# Altium PCB MCU_M_V2.PcbDoc
Units mm, origin at the board's own origin, x right, y up, seen from the top; angles counter-clockwise.
Board outline 26.88 x 19 mm, 2 copper layers (Top Layer, Bottom Layer); 30 components, 52 nets, 164 pads, 77 vias.
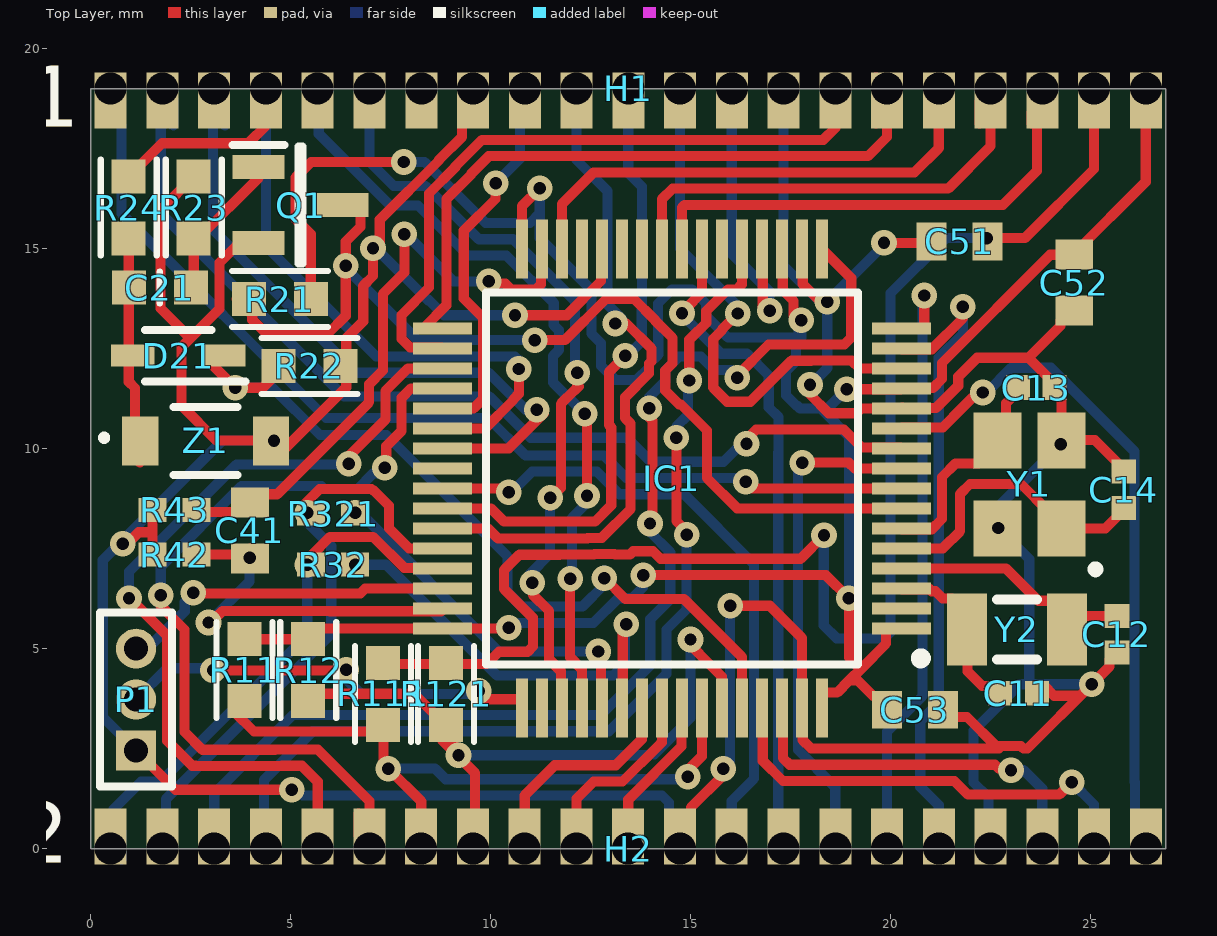
[diagram p0: Top Layer view]
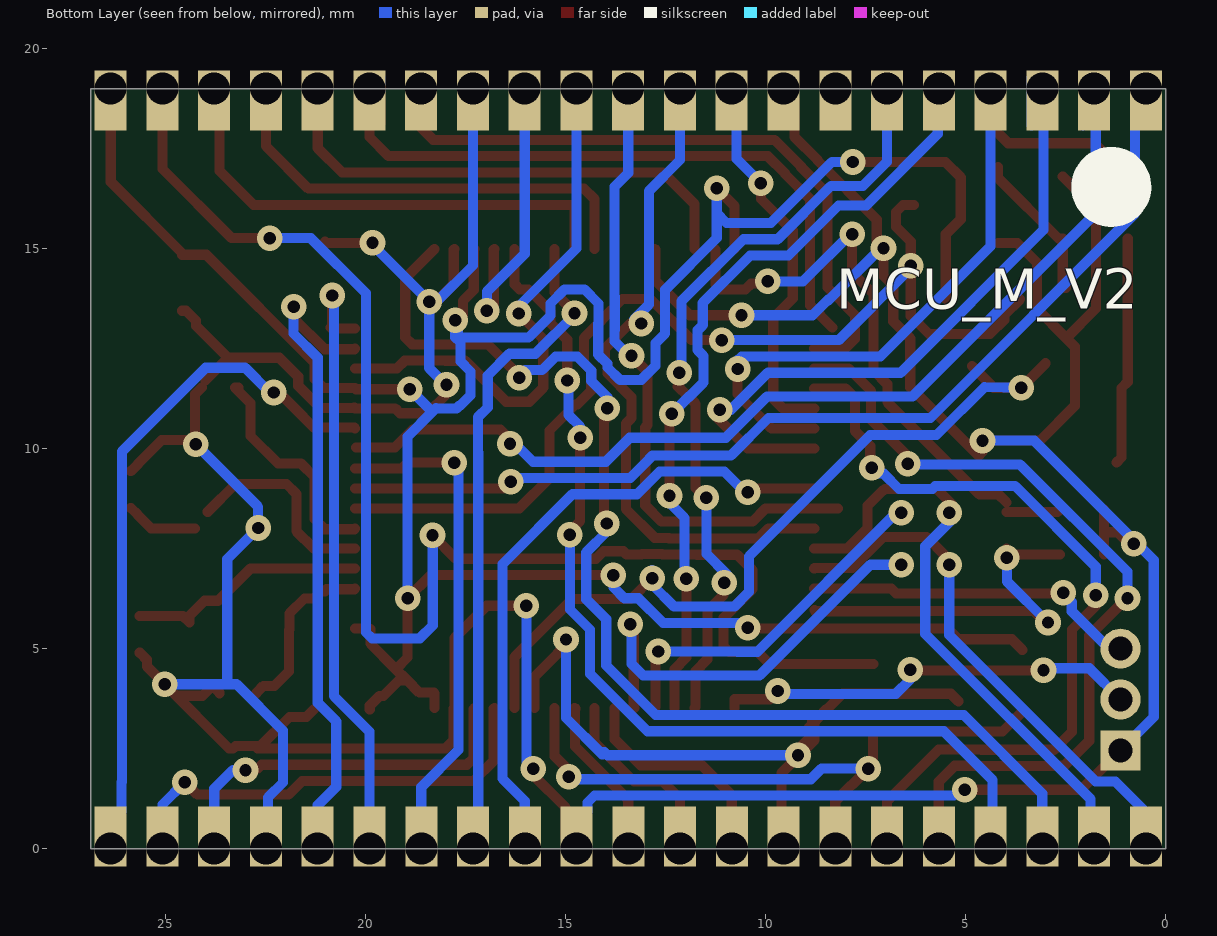
[diagram p1: Bottom Layer view, seen from below]
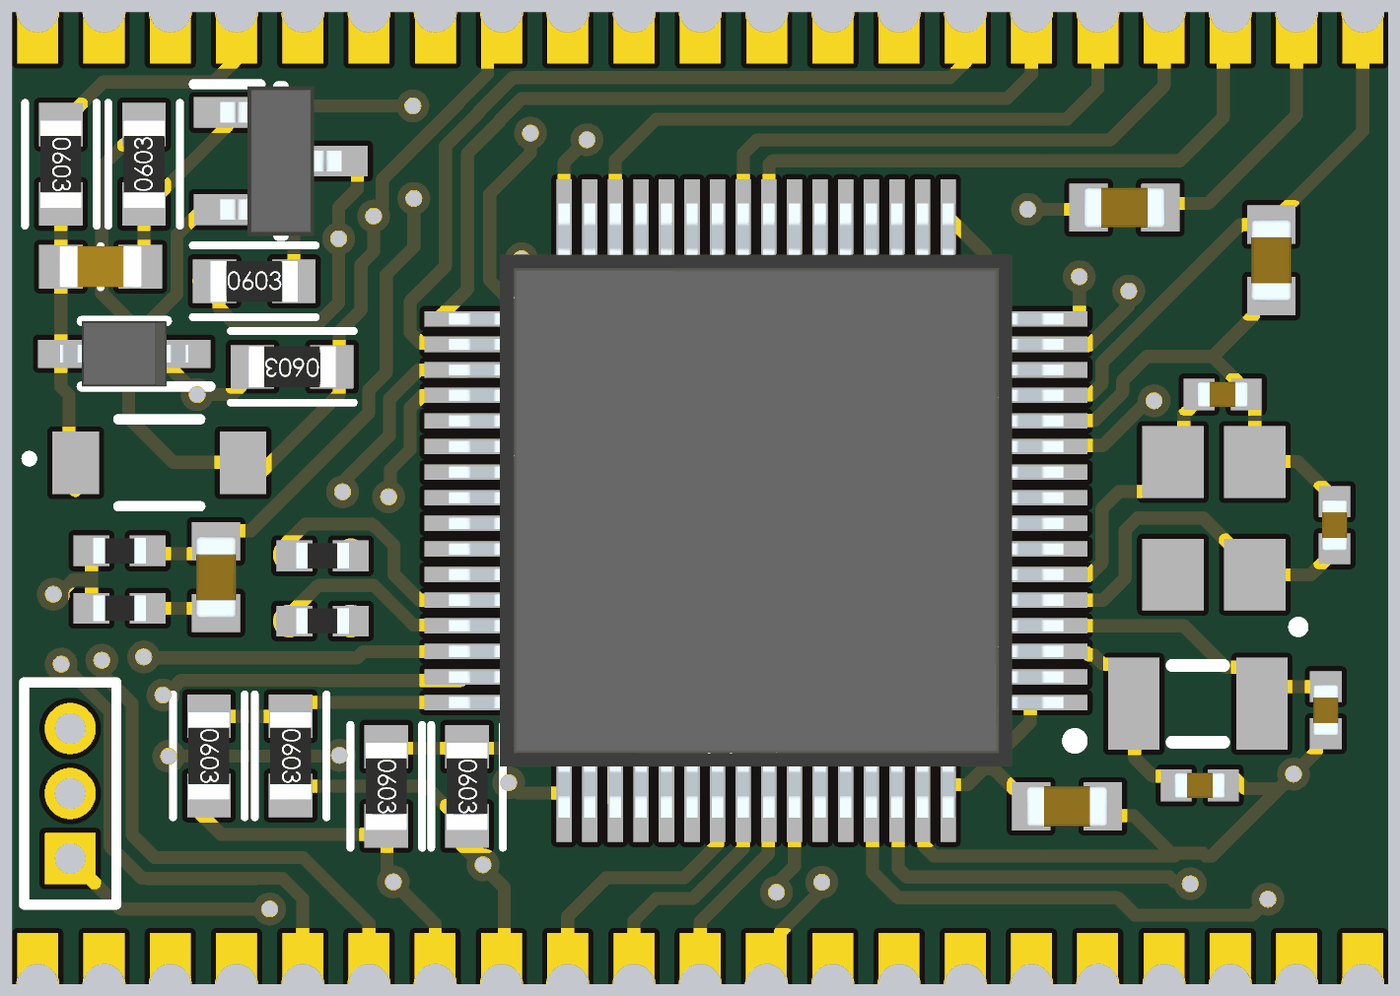
[diagram p2: 3D render of the assembled board from above, using the file's embedded part models]

## Layer stack, top to bottom
Top Solder: solder mask 0.0102, Solder Resist, Dk 3.5
Top Layer: signal copper 0.0356
Dielectric 1: dielectric 0.32, FR-4, Dk 4.8
Bottom Layer: signal copper 0.0356
Bottom Solder: solder mask 0.0102, Solder Resist, Dk 3.5

## Board outline
0,0 26.876,0 26.876,19 0,19

## Design rules (kind name [scope] priority, off if disabled: settings)
AssemblyTestPointUsage SilkToBoardRegionClearance_1 [All] p2:
AssemblyTestPointUsage SilkToBoardRegionClearance [All] p3:
Clearance [All] p1: gap=0.152 ignorepadtopadclearanceinfootprint=FALSE except(0: Arc-Hole Track-Hole SMDPad-Hole THPad-Hole Via-Hole Fill-Hole Poly-Hole Region-Hole Text-Hole)
FanoutControl Fanout_Default [All] p5: bgadir=In bgaviamode=Centered fanoutstyle=Auto fanoutdirection=Alternating viagrid=0.025 // Fanout_Default (Default Rule)
HoleSize [All] p1: absolutevalues=TRUE maxlimit=6.35 minlimit=0.3 maxpercent=80.000 minpercent=20.000
MatchedLengths DiffPair_DIFF100MatchedLengths [InDifferentialPairClass('DIFF100')] p1: tolerance=0.152 checknetsindiffpair=TRUE checkdiffpairvsdiffpair=FALSE checkxsignals=FALSE checkothers=FALSE usedelayunits=FALSE
MinimumSolderMaskSliver [All] p1: minsoldermaskwidth=0.05
MinimumSolderMaskSliver SilkscreenOverComponentPads_2 [All] p2: minsoldermaskwidth=0.254
MinimumSolderMaskSliver SilkToSolderMaskClearance_1 [IsPad] p3: minsoldermaskwidth=0.1
MinimumSolderMaskSliver SilkscreenOverComponentPads_1 [All] p4: minsoldermaskwidth=0.254
MinimumSolderMaskSliver SilkToSolderMaskClearance [IsPad] p5: minsoldermaskwidth=0.254
MinimumSolderMaskSliver SilkscreenOverComponentPads [All] p6: minsoldermaskwidth=0.254
PolygonConnect [All] p1: connectstyle=Direct reliefconductorwidth=0.254 reliefentries=4 polygonreliefangle="90 Angle" airgapwidth=0.254
RoomDefinition MCU_M_V2 [InComponentClass('MCU_M_V2')] p1: confinementstyle=ConfineIn formatcopy=TRUE lockcomponents=FALSE outline -0.076,-0.584 26.962,-0.584 26.962,19.558 -0.076,19.558
RoutingVias [All] p1: holewidth=0.305 width=0.635 viastyle="Through Hole" minholewidth=0.305 minwidth=0.635 maxholewidth=0.711 maxwidth=1.27
SMDNeckDown [All] p1: percent=90.000
SilkToBoardRegionClearance SilkToBoardRegionClearance_2 [All] p1:
SilkToSolderMaskClearance SilkToSolderMaskClearance_2 [IsPad] p1: minsilkscreentomaskgap=0.1 clearancetoexposedcopper=TRUE
SolderMaskExpansion [All] p1: expansion=0.102
Width [All] p1: maxlimit=2.54 minlimit=0.152 preferedwidth=0.254
25 further rules are at their usual default settings.

## Components (designator, comment, footprint, x,y, rotation, side; value= is the part's Value field where it differs from the comment)
C11 "GCQ1555C1H180FB01D" CAPC1005X55N 23.194,3.887 r180 top
C12 "GCQ1555C1H180FB01D" CAPC1005X55N 25.657,5.359 r90 top
C13 "GCQ1555C1H8R0BB01D" CAPC1005X55N 23.641,11.529 r180 top
C14 "GCQ1555C1H8R0BB01D" CAPC1005X55N 25.826,8.973 r270 top
C21 "0.10µF" SMD-0603C 1.727,14.025 r270 top
C41 "GRM188R71A225KE15D" CAPC1608X90N 3.982,7.957 r270 top
C51 "C0603C104K8RACTU" CAPC1608X90N 21.723,15.18 r0 top
C52 "C0603C104K8RACTU" CAPC1608X90N 24.59,14.15 r90 top
C53 "C0603C104K8RACTU" CAPC1608X90N 20.602,3.478 r180 top
D21 "BAT60JFILM" SOD2513X117N 2.189,12.324 r180 top
H1 "CASTELLATED 21 pin" "CASTELLATED 21 pin" 26.378,19 r180 top locked
H2 "CASTELLATED 21 pin" "CASTELLATED 21 pin" 0.5,0 r0 top
IC1 "STM32F107RCT6" QFP50P1200X1200X160-64N 14.529,9.258 r180 top
P1 "MHDR1X3" MHDR1X3 1.134,2.459 r90 top
Q1 "IRLML6246TRPBF" SOT95P237X112-3N 5.249,16.091 r0 top
R11 "10k" SMD-0603-RES 3.842,4.465 r180 top
R12 "10k" SMD-0603-RES 5.439,4.465 r180 top
R21 "10k" SMD-0603-RES 4.728,13.74 r270 top
R22 "10k" SMD-0603-RES 5.47,12.068 r90 top
R23 "100k" SMD-0603-RES 2.576,16.028 r0 top
R24 "1k" SMD-0603-RES 0.95,16.028 r180 top
R32 "RK73Z1ETTP" RESC1005X40N 6.062,7.1 r0 top
R42 "RK73Z1ETTP" RESC1005X40N 2.099,7.351 r180 top
R43 "RK73Z1ETTP" RESC1005X40N 2.099,8.473 r180 top
R111 "10k" SMD-0603-RES 7.306,3.87 r180 top
R121 "10k" SMD-0603-RES 8.883,3.87 r180 top
R321 "RK73Z1ETTP" RESC1005X40N 6.062,8.375 r0 top
Y1 "NX3225GA-25.000M-STD-CRG-1" NX3225SA_1 23.47,9.106 r90 top
Y2 "NX3215SA-32.768K-STD-MUA-8" NX3215SA 23.157,5.482 r0 top
Z1 "BZT52-C3V6J" SOD123 2.874,10.193 r0 top

## Footprints (in the part's own frame and the unit in brackets; to place one, negate y for a bottom-side part, rotate by r counter-clockwise, add the part's x,y. Pads: shape width x height; smd on the part's side, far side on the other; paste and mask are expansions set on the pad)
CAPC1005X55N [mm]
  rect 0.6x0.62 smd: 1(-0.46,0) 2(0.46,0)
  body extent -0.5,-0.25 0.5,0.25, height 0.55
CAPC1608X90N [mm]
  rect 0.75x0.94 smd: 1(-0.7,0) 2(0.7,0)
  body extent -0.8,-0.4 0.8,0.4, height 0.9
"CASTELLATED 21 pin" [mm]
  rect 0.8x1.4 / inner rect 0.8x1.5 / far side rect 0.8x1.5 hole 0.8 copper offset 0,0.3: 1(0,0) 2(1.294,0) 3(2.587,0) 4(3.881,0) 5(5.175,0) 6(6.469,0) 7(7.762,0) 8(9.056,0) 9(10.35,0) 10(11.644,0) 11(12.938,0) 12(14.232,0) 13(15.526,0) 14(16.82,0) 15(18.114,0) 16(19.408,0) 17(20.702,0) 18(21.996,0) 19(23.29,0) 20(24.584,0) 21(25.878,0)
MHDR1X3 [mm] "Connector; Header; 3 Position"
  rect 1x1 hole 0.6: 1(0,0)
  round 1 hole 0.6: 2(1.27,0) 3(2.54,0)
  silkscreen extent -0.9,-0.9 3.44,0.9
NX3215SA [mm]
  rect 1x1.8 smd: 1(-1.25,0) 2(1.25,0)
  silkscreen extent -0.5,-0.75 0.5,0.75
NX3225SA_1 [mm]
  rect 1.4x1.2 smd: 1(-1.1,-0.8) 2(1.1,-0.8) 3(1.1,0.8) 4(-1.1,0.8)
  silkscreen extent -2.19,-1.72 -2.05,-1.58
QFP50P1200X1200X160-64N [mm]
  rect 1.475x0.3 smd: 1(-5.738,3.75) 2(-5.738,3.25) 3(-5.738,2.75) 4(-5.738,2.25) 5(-5.738,1.75) 6(-5.738,1.25) 7(-5.738,0.75) 8(-5.738,0.25) 9(-5.738,-0.25) 10(-5.738,-0.75) 11(-5.738,-1.25) 12(-5.738,-1.75) 13(-5.738,-2.25) 14(-5.738,-2.75) 15(-5.738,-3.25) 16(-5.738,-3.75) 33(5.738,-3.75) 34(5.738,-3.25) 35(5.738,-2.75) 36(5.738,-2.25) 37(5.738,-1.75) 38(5.738,-1.25) 39(5.738,-0.75) 40(5.738,-0.25) 41(5.738,0.25) 42(5.738,0.75) 43(5.738,1.25) 44(5.738,1.75) 45(5.738,2.25) 46(5.738,2.75) 47(5.738,3.25) 48(5.738,3.75)
  rect 0.3x1.475 smd: 17(-3.75,-5.738) 18(-3.25,-5.738) 19(-2.75,-5.738) 20(-2.25,-5.738) 21(-1.75,-5.738) 22(-1.25,-5.738) 23(-0.75,-5.738) 24(-0.25,-5.738) 25(0.25,-5.738) 26(0.75,-5.738) 27(1.25,-5.738) 28(1.75,-5.738) 29(2.25,-5.738) 30(2.75,-5.738) 31(3.25,-5.738) 32(3.75,-5.738) 49(3.75,5.738) 50(3.25,5.738) 51(2.75,5.738) 52(2.25,5.738) 53(1.75,5.738) 54(1.25,5.738) 55(0.75,5.738) 56(0.25,5.738) 57(-0.25,5.738) 58(-0.75,5.738) 59(-1.25,5.738) 60(-1.75,5.738) 61(-2.25,5.738) 62(-2.75,5.738) 63(-3.25,5.738) 64(-3.75,5.738)
  silkscreen extent -6.35,-4.65 4.65,4.65, body extent -6,-6 6,6, height 1.6
RESC1005X40N [mm]
  rect 0.7x0.6 smd: 1(-0.55,0) 2(0.55,0)
  body extent -0.51,-0.25 0.51,0.25, height 0.4
SMD-0603-RES [mm]
  rect 0.85x0.85 smd: 1(0,0.775) 2(0,-0.775)
  silkscreen extent -0.7,-1.2 0.7,1.2, body extent -0.4,-0.85 0.4,0.85, height 0.56
SMD-0603C [mm]
  rect 0.85x0.85 smd: 1(0,0.775) 2(0,-0.775)
  silkscreen extent -0.4,0 0.4,0, body extent -0.4,-0.8 0.4,0.8, height 0.9
SOD123 [mm]
  rect 0.91x1.22 smd: 1(-1.635,0) 2(1.635,0)
  silkscreen extent -2.59,-0.85 0.8,0.85
SOD2513X117N [mm]
  rect 1.085x0.55 smd: 1(-1.14,0) 2(1.14,0)
  silkscreen extent -1.68,-0.64 0.83,0.64, body extent -1.25,-0.64 1.25,0.64, height 1.17
SOT95P237X112-3N [mm]
  rect 1.3x0.6 smd: 1(-1.05,0.95) 2(-1.05,-0.95) 3(1.05,0)
  silkscreen extent -1.7,-1.46 0.05,1.5, body extent -1.18,-1.46 1.18,1.46, height 1.12

## Part data
C11 C12: "Capacitor", Manufacturer_Name="Murata Electronics", Supplier Part Number 1=81-GCQ1555C1H180FB1D, Datasheet Link=https://search.murata.co.jp/Ceramy/image/img/A01X/G101/ENG/GCQ1555C1H180FB01-01.pdf, Height=0.55mm, Manufacturer_Part_Number=GCQ1555C1H180FB01D, Supplier 1=Mouser
C13 C14: "Capacitor", Manufacturer_Name="Murata Electronics", Supplier Part Number 1=81-GCQ1555C1H8R0BB1D, Datasheet Link=https://psearch.en.murata.com/capacitor/product/GCQ1555C1H8R0BB01%23.html, Height=0.55mm, Manufacturer_Part_Number=GCQ1555C1H8R0BB01D, Supplier 1=Mouser
C21: library part GCJ188R71H104KA12D, "CAP CER 0.1UF 50V X7R 0603", Digi-Key Part Number=490-5798-1-ND, Manufacturer="Murata Electronics North America", Operating Temperature="-55°C ~ 125°C", Package / Case="0603 (1608 Metric)", Ratings=AEC-Q200, Supplier Part Number 1=81-GCJ188R71H104KA2D, Temperature Coefficient=X7R, Tolerance=±10%, Voltage=50V, @ qty=0, Applications="Automotive, Boardflex Sensitive", Datasheets=http://www.murata.com/~/media/webrenewal/support/library/catalog/products/capacitor/mlcc/c03e.ashx, Factory Stock=0, Features="Soft Termination", Height - Seated (Max)=-, Image=//media.digikey.com/Renders/Murata%20Renders/0603%28LQG18%29.jpg, Lead Spacing=-, Lead Style=-, Minimum Quantity=1, Mounting Type="Surface Mount, MLCC", Packaging="Cut Tape (CT)", Part Number=GCJ188R71H104KA12D, Part Status=Active, Quantity Available=163695, Series=GCJ, Size / Dimension="0.063\" L x 0.031\" W (1.60mm x 0.80mm)", Supplier 1=Mouser, Thickness (Max)="0.035\" (0.90mm)", Unit Price (USD)=0.12
C41: "Capacitor", Manufacturer_Name="Murata Electronics", Supplier Part Number 1=81-GRM188R71A225KE15, Datasheet Link=https://psearch.en.murata.com/capacitor/product/GRM188R71A225KE15%23.html, Height=0.9mm, Manufacturer_Part_Number=GRM188R71A225KE15D, Supplier 1=Mouser
C51 C52 C53: "Capacitor", Manufacturer_Name=Kemet, Supplier Part Number 1=80-C0603C104K8R, Datasheet Link=https://search.kemet.com/component-edge/download/specsheet/C0603C104K8RACTU.pdf, Height=0.9mm, Manufacturer_Part_Number=C0603C104K8RACTU, Supplier 1=Mouser
D21: "Diode", Manufacturer_Name=STMicroelectronics, Mouser2 Part Number=511-BAT60JFILM, Datasheet Link=https://componentsearchengine.com/Datasheets/1/BAT60JFILM.pdf, Height=1.17mm, Manufacturer_Part_Number=BAT60JFILM, Mouser2 Price/Stock=https://www.mouser.com/Search/Refine.aspx?Keyword=511-BAT60JFILM, Supplier 1=Mouser, Supplier Part Number 1=511-BAT60JFILM
IC1: "Integrated Circuit", Manufacturer_Name=STMicroelectronics, Mouser2 Part Number=511-STM32F107RCT6, Datasheet Link=https://componentsearchengine.com/Datasheets/1/STM32F107RCT6.pdf, Height=1.6mm, Manufacturer_Part_Number=STM32F107RCT6, Mouser2 Price/Stock=https://www.mouser.com/Search/Refine.aspx?Keyword=511-STM32F107RCT6, Supplier 1=Mouser, Supplier Part Number 1=511-STM32F107RCT6
P1: "Header, 3-Pin", LatestRevisionDate=17-Jul-2002, LatestRevisionNote="Re-released for DXP Platform.", Publisher="Altium Limited"
Q1: "MOSFET (N-Channel)", Manufacturer_Name=Infineon, Supplier Part Number 1=942-IRLML6246TRPBF, Height=1.12mm, Manufacturer_Part_Number=IRLML6246TRPBF, Supplier 1=Mouser
R11 R12 R21 R22 R111 R121: library part ERJ-3EKF1002V, "RES SMD 10K OHM 1% 1/10W 0603", Digi-Key Part Number=P10.0KHCT-ND, Manufacturer="Panasonic Electronic Components", Operating Temperature="-55°C ~ 155°C", Package / Case="0603 (1608 Metric)", Power (Watts)="0.1W, 1/10W", Supplier Device Package=0603, Supplier Part Number 1=667-ERJ-3EKF1002V, Temperature Coefficient=±100ppm/°C, Tolerance=±1%, @ qty=1500, Composition="Thick Film", Datasheets=http://industrial.panasonic.com/www-cgi/jvcr13pz.cgi?E+PZ+3+AOA0002+ERJ3EKF1002V+7+WW, Factory Stock=0, Failure Rate=-, Features="Automotive AEC-Q200", Height - Seated (Max)="0.022\" (0.55mm)", Image=//media.digikey.com/Photos/Panasonic%20Photos/MFG_ERJ-P6W%20Series.jpg, Minimum Quantity=1, Number of Terminations=2, Packaging="Cut Tape (CT)", Part Number=ERJ-3EKF1002V, Part Status=Active, Quantity Available=6703141, Series=ERJ, Size / Dimension="0.063\" L x 0.031\" W (1.60mm x 0.80mm)", Supplier 1=Mouser, Unit Price (USD)=0.00379
R23: library part ERJ-3EKF1003V, "RES SMD 100K OHM 1% 1/10W 0603", Digi-Key Part Number=P100KHCT-ND, Manufacturer="Panasonic Electronic Components", Operating Temperature="-55°C ~ 155°C", Package / Case="0603 (1608 Metric)", Power (Watts)="0.1W, 1/10W", Supplier Device Package=0603, Supplier Part Number 1=667-ERJ-3EKF1003V, Temperature Coefficient=±100ppm/°C, Tolerance=±1%, @ qty=1500, Composition="Thick Film", Datasheets=http://industrial.panasonic.com/www-cgi/jvcr13pz.cgi?E+PZ+3+AOA0002+ERJ3EKF1003V+7+WW, Factory Stock=0, Failure Rate=-, Features="Automotive AEC-Q200", Height - Seated (Max)="0.022\" (0.55mm)", Image=//media.digikey.com/Photos/Panasonic%20Photos/MFG_ERJ-P6W%20Series.jpg, Minimum Quantity=1, Number of Terminations=2, Packaging="Cut Tape (CT)", Part Number=ERJ-3EKF1003V, Part Status=Active, Quantity Available=2179804, Series=ERJ, Size / Dimension="0.063\" L x 0.031\" W (1.60mm x 0.80mm)", Supplier 1=Mouser, Unit Price (USD)=0.00379
R24: library part ERJ-3EKF1001V, "RES SMD 1K OHM 1% 1/10W 0603", Digi-Key Part Number=P1.00KHCT-ND, Manufacturer="Panasonic Electronic Components", Operating Temperature="-55°C ~ 155°C", Package / Case="0603 (1608 Metric)", Power (Watts)="0.1W, 1/10W", Supplier Device Package=0603, Supplier Part Number 1=667-ERJ-3EKF1001V, Temperature Coefficient=±100ppm/°C, Tolerance=±1%, @ qty=1500, Composition="Thick Film", Datasheets=http://industrial.panasonic.com/www-cgi/jvcr13pz.cgi?E+PZ+3+AOA0002+ERJ3EKF1001V+7+WW, Factory Stock=0, Failure Rate=-, Features="Automotive AEC-Q200", Height - Seated (Max)="0.022\" (0.55mm)", Image=//media.digikey.com/Photos/Panasonic%20Photos/MFG_ERJ-P6W%20Series.jpg, Minimum Quantity=1, Number of Terminations=2, Packaging="Cut Tape (CT)", Part Number=ERJ-3EKF1001V, Part Status=Active, Quantity Available=5218845, Series=ERJ, Size / Dimension="0.063\" L x 0.031\" W (1.60mm x 0.80mm)", Supplier 1=Mouser, Unit Price (USD)=0.00379
R32 R42 R43 R321: "Resistor", Manufacturer_Name="KOA Speer", Supplier Part Number 1=660-RK73Z1ETTP, Height=0.4mm, Manufacturer_Part_Number=RK73Z1ETTP, Supplier 1=Mouser
Y1: "Crystal or Oscillator", Manufacturer_Name=NDK, Mouser2 Part Number=344-NX3225GA25MSTRG1, Datasheet Link=https://componentsearchengine.com/Datasheets/1/NX3225GA-25.000M-STD-CRG-1.pdf, Manufacturer_Part_Number=NX3225GA-25.000M-STD-CRG-1, Mouser2 Price/Stock=https://www.mouser.com/Search/Refine.aspx?Keyword=344-NX3225GA25MSTRG1, Supplier 1=Mouser, Supplier Part Number 1=344-NX3225GA25MSTRG1
Y2: "Crystal or Oscillator", Manufacturer_Name=NDK, Mouser2 Part Number=344-NX3215SA32768K8, Datasheet Link=https://componentsearchengine.com/Datasheets/1/NX3215SA-32.768K-STD-MUA-8.pdf, Manufacturer_Part_Number=NX3215SA-32.768K-STD-MUA-8, Mouser2 Price/Stock=https://www.mouser.com/Search/Refine.aspx?Keyword=344-NX3215SA32768K8, Supplier 1=Mouser, Supplier Part Number 1=344-NX3215SA32768K8
Z1: "Zener Diode", Manufacturer_Name=Nexperia, Mouser2 Part Number=771-BZT52-C3V6J, Datasheet Link=https://componentsearchengine.com/Datasheets/1/BZT52-C3V6J.pdf, Manufacturer_Part_Number=BZT52-C3V6J, Mouser2 Price/Stock=https://www.mouser.com/Search/Refine.aspx?Keyword=771-BZT52-C3V6J, Supplier 1=Mouser, Supplier Part Number 1=771-BZT52-C3V6J

## Via types
v1: diameter 0.64, hole 0.31, Top Layer to Bottom Layer, tented both sides, 77 vias

## Nets (pads, with @x,y where several pads share a name; then routed paths per layer and width w, separated by ;. In a path a pad name is that pad's centre, name@x,y a point inside that pad or via, vN(x,y) a via of type N, cw(c..) or ccw(c..) an arc to the next point about the centre after c; other vN are vias at no path point)
B1: H2.7 IC1.58 R11.1 R111.1 | length 16.7
  Top Layer w0.254: R11.1@3.589,3.421 4.081,2.929 7.322,2.929 7.322,2.123 v1(7.443,2.002) 8.263,1.182 H2.7 ; v1(14.927,1.798) 14.927,1.957 15.279,2.309 IC1.58
  Bottom Layer w0.254: v1(7.443,2.002) 8.611,2.002 8.877,1.736 14.865,1.736 v1(14.927,1.798)
B2: H2.8 IC1.59 R12.1 R121.1 | length 19.6
  Top Layer w0.254: R12.1@5.186,3.685 5.374,3.873 8.081,3.873 R121.1@8.482,3.472 ; R121.1@8.848,3.198 R121.1@8.848,3.106 ; v1(9.196,2.336) 9.196,2.487 R121.1@8.78,2.903 ; H2.8 9.611,0.055 9.611,1.889 8.78,2.72 R121.1@8.78,2.903 ; v1(14.996,5.23) 14.994,5.23 14.923,5.159 14.924,5.158 15.545,4.537 15.779,4.303 IC1.59 ; R121.1@8.482,3.472 R121.1@8.685,3.269 ; R121.1@8.482,3.472 8.482,3.496 R121.1@8.697,3.281 ; R121.1@8.685,3.269 R121.1@8.697,3.281 ; R121.1@8.685,3.269 R121.1@8.78,3.174 ; R121.1@8.697,3.281 8.78,3.198 R121.1@8.78,3.174 ; R121.1@8.78,2.903 R121.1@8.78,3.174 ; R121.1@8.78,2.903 R121.1@8.848,2.971 ; R121.1@8.78,3.174 R121.1@8.848,3.106 ; R121.1@8.848,2.971 R121.1@8.848,3.106 ; R121.1@8.848,2.971 8.915,3.039 R121.1@8.848,3.106
  Bottom Layer w0.254: v1(9.196,2.336) 13.962,2.336 14.038,2.411 14.089,2.36 14.996,3.267 v1(14.996,5.23)
B3: H2.9 IC1.55 | length 5.6
  Top Layer w0.254: H2.9 10.85,1.333 11.601,2.084 13.125,2.084 13.779,2.738 IC1.55
B4: H2.11 IC1.57 | length 4.1
  Top Layer w0.254: H2.11 13.438,1.224 14.767,2.553 IC1.57@14.767,3.509 ; IC1.57@14.756,3.497 IC1.57@14.767,3.509 ; IC1.57 IC1.57@14.767,3.509
B5: H2.10 IC1.56 | length 4.8
  Top Layer w0.254: H2.10 12.144,1.247 12.574,1.678 13.293,1.678 14.185,2.569 14.273,2.657 14.279,2.657 IC1.56
BOOT0: D21.1 IC1.60 R22.1 | length 20.5
  Top Layer w0.254: D21.1@3.004,12.134 v1(3.613,11.525) 4.304,11.525 R22.1@4.843,12.064 ; v1(12.844,6.765) 13.37,6.239 14.835,6.239 16.279,4.795 IC1.60 ; v1@12.844,6.79 12.932,6.79 v1@12.936,6.794
  Bottom Layer w0.254: v1(3.613,11.525) 4.531,11.544 5.735,10.34 7.388,10.34 10.42,7.309 10.42,6.422 10.79,6.052 12.29,6.052 12.844,6.605 v1(12.844,6.765) v1@12.844,6.963
GND: C11.1 C12.1 C13.1 C14.1 C51.1 C52.1 C53.1 H1.8 H1.14 H2.12 H2.18 IC1.12 IC1.18 IC1.28 IC1.63 P1.1 Q1.2 R22.2 R23.1 R42.2 R43.2 Y1.2 Y1.4 Z1.2 | length 123.9
  Top Layer w0.254: v1(0.804,7.624) 0.911,7.624 1.199,7.912 1.549,7.912 ; P1.1 2.121,1.472 v1(5.029,1.472) ; R42.2 1.549,7.912 ; R43.2 1.549,7.912 ; R23.1 1.749,15.976 1.749,13.503 2.487,12.765 ; Q1.2 3.712,15.141 3.219,14.648 3.219,13.497 2.487,12.765 ; H1.14 9.285,18.727 9.285,17.797 8.71,17.222 8.71,17.205 7.228,15.724 7.228,15.184 v1(7.059,15.015) 7.059,14.316 6.814,14.071 6.814,13.183 6.388,12.758 6.388,11.535 4.676,9.822 4.582,9.916 v1(4.582,10.201) 3.147,10.201 2.273,11.075 2.273,12.551 2.487,12.765 ; v1(10.608,13.337) 11.902,13.337 12.756,14.191 12.756,14.973 IC1.28 ; H2.12 15.005,0.273 15.005,1.029 15.812,1.836 v1(15.812,1.995) ; v1(15.985,6.073) 16.977,6.073 17.779,5.271 IC1.63 17.802,3.497 17.802,2.715 18.013,2.503 22.7,2.503 ; IC1.18 17.802,14.973 17.802,14.113 18.237,13.678 v1(18.415,13.678) ; v1(17.984,11.601) 17.984,11.354 18.451,10.886 19.146,10.886 19.268,11.008 IC1.12 IC1.12@20.278,11.02 ; v1(19.832,15.146) 20.989,15.146 C51.1 ; IC1.12@20.29,11.031 IC1.12@20.278,11.02 ; C53.1 21.486,3.294 21.909,3.294 22.64,2.563 23.256,2.563 23.316,2.503 23.419,2.503 v1(25.025,4.109) ; C11.1 23.654,3.897 23.827,4.07 23.837,4.07 24.084,3.823 24.739,3.823 v1(25.025,4.109) ; C13.1@24.012,11.704 23.444,12.272 ; C13.1@24.095,11.529 C13.1 24.27,11.36 Y1.2 ; Y1.2@24.28,10.216 25.102,10.216 25.696,9.622 25.696,9.612 25.869,9.439 C14.1@25.879,9.439 ; C52.1 24.495,13.45 24.247,13.202 24.247,13.075 23.444,12.272 ; C12.1 25.647,4.899 25.474,4.726 25.474,4.558 v1(25.025,4.109) ; IC1.12@20.278,11.02 21.136,11.02 21.69,11.574 21.69,11.797 22.165,12.272 23.444,12.272
  Bottom Layer w0.254: P1.1 0.301,3.292 0.301,7.215 3.287,10.201 v1(4.582,10.201) ; v1(5.029,1.472) 5.029,1.488 v1@5.084,1.543 ; v1@5.078,1.549 5.298,1.329 14.284,1.329 14.459,1.154 14.459,0.923 14.732,0.65 H2.12 ; v1(7.059,15.015) 7.125,15.015 8.431,13.709 8.447,13.725 8.835,13.337 v1(10.608,13.337) ; v1(15.812,1.995) 15.985,2.168 v1(15.985,6.073) ; H1.8 17.322,14.579 18.223,13.678 v1(18.415,13.678) ; v1(17.984,11.601) 18.002,11.601 18.415,12.014 v1(18.415,13.678) ; v1(19.832,15.146) 19.832,15.095 v1(18.415,13.678) ; H2.18 22.446,0.05 22.446,1.282 22.072,1.656 22.072,2.952 23.229,4.109 v1(25.025,4.109) 23.558,4.109 23.465,4.202 23.465,7.243 v1(22.692,8.016) 22.692,8.545 v1(24.255,10.108)
M1_D1: H2.2 IC1.44 R321.1 | length 15.2
  Top Layer w0.254: R321.1@5.465,8.347 5.514,8.396 R321.1@5.514,8.394 ; R321.1@5.514,8.468 5.5,8.482 5.357,8.625 5.726,8.994 7.019,8.994 7.059,8.954 7.078,8.954 7.456,8.576 7.456,8.012 7.96,7.508 IC1.44
  Bottom Layer w0.254: H2.2 1.794,0.35 1.88,0.436 1.88,1.235 6.013,5.368 6.013,7.56 5.413,8.16 v1(5.413,8.394)
M1_D2: H2.1 IC1.45 R32.1 | length 15.3
  Top Layer w0.254: R32.1@5.364,7.248 5.38,7.232 R32.1@5.438,7.174 ; v1(5.413,7.1) 5.364,7.1 R32.1@5.438,7.174 ; 6.363,7.796 5.983,7.796 5.512,7.325 R32.1 5.462,7.15 R32.1@5.438,7.174 ; 6.364,7.795 7.058,7.795 ; 7.078,7.781 7.839,7.02 8.779,7.02 IC1.45
  Bottom Layer w0.254: v1(5.413,7.1) 5.413,5.343 1.75,1.68 1.261,1.68 0.569,0.988 H2.1@0.569,0.65 ; H2.1@0.5,0.65 H2.1@0.569,0.65 ; H2.1@0.5,0.65 0.535,0.684 H2.1@0.569,0.65 ; H2.1@0.5,0.65 H2.1 0.773,-0.273 0.773,0.446 H2.1@0.569,0.65
M1_D3: H2.4 IC1.21 | length 24.9
  Top Layer w0.254: v1(14.643,10.274) 14.643,8.19 14.897,7.936 v1(14.897,7.849) ; v1(14.964,11.705) 14.964,12.722 15.026,12.784 15.031,12.784 15.391,13.144 15.391,13.44 15.93,13.979 16.15,13.979 16.279,14.108 IC1.21
  Bottom Layer w0.254: H2.4 4.329,0.052 4.329,1.711 5.553,2.935 12.957,2.935 14.397,4.375 14.397,5.48 14.897,5.98 v1(14.897,7.849) ; v1(14.643,10.274) 14.643,10.554 14.929,10.84 14.929,11.503 v1@15.131,11.705 ; v1(14.964,11.705) v1@15.131,11.705 ; v1@15.133,11.707 v1@15.131,11.705
M1_D4: H2.3 IC1.17 | length 29.7
  Top Layer w0.254: v1(13.96,11.012) 13.96,10.781 14.044,10.697 14.044,8.217 13.956,8.129 v1(13.982,8.129) ; v1(16.163,11.774) 16.163,11.823 16.947,12.607 17.838,12.607 17.839,12.608 18.843,12.608 19.014,12.779 19.014,14.261 IC1.17
  Bottom Layer w0.254: H2.3 3.088,1.378 5.052,3.342 12.755,3.342 13.991,4.578 13.991,5.736 14.491,6.236 14.491,7.407 13.97,7.928 13.982,7.94 v1(13.982,8.129) ; v1(13.96,11.012) 13.96,11.286 14.365,11.692 14.365,11.953 14.716,12.304 15.255,12.304 15.592,11.967 16.019,11.967 16.163,11.823 v1(16.163,11.774)
M1_D5: H1.20 IC1.10 | length 26.2
  Top Layer w0.254: v1(16.396,10.122) 16.396,10.242 16.631,10.477 18.831,10.477 19.277,10.031 IC1.10@20.244,10.031
  Bottom Layer w0.254: H1.20@1.862,18.282 H1.20@1.931,18.214 ; v1(16.396,10.122) 16.268,10.122 15.821,9.675 13.998,9.675 13.773,9.9 13.401,10.272 11.003,10.272 9.974,11.301 6.339,11.301 1.753,15.888 1.753,18.036 H1.20@1.931,18.214 ; H1.20@1.931,18.214 2.067,18.077 2.067,18.727 H1.20 1.794,18.35 H1.20@1.931,18.214
M1_D6: H1.21 IC1.8 | length 25.6
  Top Layer w0.254: v1(16.378,9.174) 16.544,9.008 IC1.8
  Bottom Layer w0.254: H1.21 0.5,18.35 0.773,18.077 0.773,15.877 5.883,10.767 9.933,10.767 10.868,9.832 12.826,9.832 13.031,9.627 13.389,9.268 16.284,9.268 v1(16.378,9.174)
M1_D7: H1.13 IC1.37 | length 9.7
  Top Layer w0.254: IC1.37 9.573,11.008 9.815,11.25 9.815,13.268 9.327,13.756 9.327,15.448 10.122,16.243 v1(10.122,16.637)
  Bottom Layer w0.254: v1(10.122,16.637) 10.731,17.247 10.731,18.879 H1.13
M2_D1: H2.17 IC1.15 | length 16.3
  Top Layer w0.254: IC1.15 20.29,12.485 21.026,12.485 21.806,13.265 v1(21.806,13.551)
  Bottom Layer w0.254: H2.17 21.202,1.085 20.739,1.548 20.739,3.183 21.202,3.646 21.202,12.274 21.806,12.878 v1(21.806,13.551)
M2_D2: H2.16 IC1.16 | length 15.7
  Top Layer w0.254: IC1.16 20.854,13.008 20.877,13.031 20.841,13.068 v1(20.841,13.83)
  Bottom Layer w0.254: H2.16 19.908,2.927 20.796,3.815 20.796,13.785 v1(20.841,13.83)
M2_D3: H2.15 IC1.9 | length 12.7
  Top Layer w0.254: v1(17.79,9.652) 18.952,9.652 19.096,9.508 IC1.9
  Bottom Layer w0.254: v1(17.79,9.652) 17.687,9.652 17.687,2.467 18.614,1.54 H2.15
M2_D4: H2.14 IC1.23 | length 16.9
  Top Layer w0.254: v1(14.782,13.383) 14.782,13.563 14.83,13.515 14.89,13.515 15.279,13.903 IC1.23
  Bottom Layer w0.254: v1(14.782,13.383) 14.726,13.383 14.705,13.362 14.772,13.362 15.761,12.373 16.412,12.373 16.954,11.831 16.954,11.03 17.198,10.785 17.198,9.909 17.19,9.901 17.19,0.13 H2.14
M2_D5: H2.13 IC1.41 | length 16.4
  Top Layer w0.254: IC1.41 10.352,9.008 v1(10.454,8.906) v1@10.532,8.906
  Bottom Layer w0.254: v1(10.454,8.906) 10.513,8.906 11.032,9.426 12.657,9.426 13.221,8.862 14.836,8.862 16.584,7.114 16.584,1.751 16.026,1.192 H2.13
M2_D6: H1.3 IC1.24 | length 13.1
  Top Layer w0.254: IC1.24 14.779,16.023 14.85,16.095 22.806,16.095 23.654,16.943 H1.3@23.654,18.264 ; H1.3 23.791,18.4 H1.3@23.654,18.264 ; H1.3@23.654,18.264 23.518,18.4 23.518,18.127 H1.3@23.654,18.264
M2_D7: H1.4 IC1.25 | length 12.8
  Top Layer w0.254: IC1.25 14.279,16.235 14.546,16.501 21.435,16.501 22.497,17.563 H1.4@22.497,18.4 ; H1.4 H1.4@22.497,18.4 ; H1.4@22.497,18.4 22.224,18.673 22.224,18.127 H1.4@22.497,18.4
M2_D8: H1.5 IC1.30 | length 12.6
  Top Layer w0.254: IC1.30 11.779,16.109 12.577,16.908 20.597,16.908 21.203,17.514 H1.5
M2_D9: H1.6 IC1.33 | length 18.2
  Top Layer w0.254: IC1.33@8.333,13.027 8.893,13.587 8.893,16.239 9.522,16.868 9.522,16.885 9.951,17.314 19.433,17.314 19.909,17.79 H1.6@19.909,18.4 ; H1.6@19.909,18.4 H1.6 19.636,19.273 19.636,18.127 H1.6@19.909,18.4
M2_D10: H1.7 IC1.34 | length 16.9
  Top Layer w0.254: IC1.34 8.768,12.531 7.985,12.531 7.773,12.744 7.773,13.342 8.459,14.028 8.459,16.38 9.116,17.037 9.116,17.054 9.783,17.721 18.318,17.721 18.616,18.019 H1.7
M3_D1: H1.16 IC1.51 | length 19.9
  Top Layer w0.254: v1(11.038,6.651) 11.054,6.635 11.054,6.347 11.461,5.941 11.461,4.733 11.754,4.44 11.754,3.545 IC1.51 ; v1(11.485,8.777) 11.485,8.63 11.461,8.606 11.483,8.584 11.507,8.584 11.615,8.692 11.519,8.788 11.755,9.024 11.755,11.12 12.106,11.471 12.118,11.471 12.201,11.554 12.16,11.595 v1(12.16,11.899)
  Bottom Layer w0.254: H1.16 6.97,17.175 7.577,16.569 8.374,16.569 9.705,15.237 10.559,15.237 12.111,13.686 12.111,12.762 ; v1(11.038,6.651) 11.038,6.732 10.991,6.779 10.991,6.878 11.485,7.371 v1(11.485,8.777) ; 12.111,12.712 12.111,11.948 v1(12.16,11.899)
M3_D2: H1.17 IC1.52 | length 19.7
  Top Layer w0.254: v1(11.985,6.752) 11.985,4.783 12.279,4.49 IC1.52 ; v1(12.354,10.871) 12.375,10.871 12.408,10.839 v1(12.408,8.826)
  Bottom Layer w0.254: H1.17 5.701,18.975 5.701,17.87 7.489,16.081 8.183,16.081 9.433,14.831 10.391,14.831 11.577,13.645 11.577,13.089 11.705,12.961 11.705,12.465 11.561,12.321 11.561,11.651 11.912,11.3 11.926,11.3 v1(12.354,10.871) ; v1(11.985,6.752) 11.985,6.93 v1@12.031,6.976 ; v1@12.031,6.934 v1@12.031,6.976 ; v1(12.408,8.826) 12.408,8.647 12.031,8.27 v1@12.031,6.976
M3_D7: H2.6 IC1.36 | length 22.2
  Top Layer w0.254: v1(1.75,6.334) 1.75,6.075 2.345,5.48 2.345,2.922 2.792,2.475 4.61,2.475 4.612,2.478 5.679,2.478 6.969,1.189 H2.6@6.969,0.6 ; H2.6 H2.6@6.969,0.6 ; v1(7.353,9.528) 7.156,9.528 7.388,9.76 7.388,10.061 7.774,10.447 7.774,11.274 8.008,11.508 IC1.36 ; H2.6@6.969,0.6 6.696,0.327 6.696,0.873 H2.6@6.969,0.6
  Bottom Layer w0.254: v1(1.75,6.334) 1.75,7.051 3.766,9.067 5.762,9.067 5.836,8.994 6.668,8.994 7.051,9.377 7.201,9.377 v1(7.353,9.528)
M4_D1: H1.11 IC1.42 | length 16.1
  Top Layer w0.254: IC1.42@8.203,8.508 IC1.42 10.004,8.508 10.335,8.177 12.606,8.177 13.016,8.587 13.016,10.534 12.954,10.596 12.954,11.914 v1(13.359,12.319)
  Bottom Layer w0.254: v1(13.359,12.319) 13.414,12.319 13.782,12.687 13.782,12.961 13.776,12.967 13.776,13.8 13.782,13.805 13.782,16.549 13.44,16.891 H1.11
M4_D2: H1.12 IC1.43 | length 17
  Top Layer w0.254: IC1.43 9.929,8.008 10.179,7.759 12.415,7.759 12.427,7.771 12.776,7.771 13.499,8.494 13.499,10.625 13.36,10.764 13.36,11.289 13.959,11.888 13.959,12.122 14.018,12.181 14.018,12.508 13.397,13.129 v1(13.117,13.129) v1@13.043,13.055
  Bottom Layer w0.254: H1.12 12.146,17.217 12.924,16.439 12.924,13.602 v1@13.293,13.233
M4_D3: H1.9 IC1.20 | length 7.7
  Top Layer w0.254: IC1.20 16.8,14.975 16.8,13.471 16.825,13.446 v1(16.973,13.446)
  Bottom Layer w0.254: H1.9 16.028,14.871 16.7,14.199 16.973,13.926 v1(16.973,13.446)
M4_D4: H1.10 IC1.14 | length 14
  Top Layer w0.254: v1@16.017,13.429 16.067,13.379 v1(16.177,13.379) 15.797,12.999 15.797,12.976 15.564,12.742 15.564,11.526 15.915,11.175 16.491,11.175 17.516,12.2 18.006,12.2 18.007,12.201 19.029,12.201 19.222,12.008 IC1.14
  Bottom Layer w0.254: H1.10 14.734,15.006 16.285,13.456 16.208,13.379 16.205,13.382 16.202,13.379 v1(16.177,13.379)
M4_D5: H1.18 IC1.38 R24.2 | length 19.4
  Top Layer w0.254: R24.2 1.784,17.637 3.942,17.637 4.382,18.077 H1.18 ; IC1.38 9.861,10.508 10.556,11.204 10.556,11.221 10.705,11.37 v1(10.705,11.992)
  Bottom Layer w0.254: H1.18 4.382,15.062 7.137,12.307 10.607,12.307 10.705,12.208 v1(10.705,11.992)
M4_D6: H1.19 IC1.39 | length 19.2
  Top Layer w0.254: IC1.39 10.453,10.008 11.328,10.884 11.24,10.972 v1(11.155,10.972)
  Bottom Layer w0.254: v1(11.155,10.972) 10.877,10.972 9.949,11.9 6.629,11.9 3.061,15.469 3.061,18.973 H1.19 ; H1.19 3.361,19.273 3.361,18.077 3.088,18.35 H1.19
M4_D7: H2.5 IC1.35 | length 21
  Top Layer w0.254: v1(0.958,6.258) 0.977,6.258 1.913,5.322 1.913,2.698 2.539,2.072 2.621,2.072 2.623,2.069 4.778,2.069 4.781,2.072 5.277,2.072 5.675,1.674 H2.5 ; v1(6.452,9.625) 6.452,9.812 7.367,10.727 7.367,11.442 7.933,12.008 IC1.35
  Bottom Layer w0.254: v1(0.958,6.258) 0.958,6.932 0.972,6.932 3.642,9.602 6.429,9.602 v1(6.452,9.625) ; 0.965,6.925 0.973,6.917
MCU_RESET: IC1.7 Q1.3 R21.2 | length 25.6
  Top Layer w0.254: R21.2@3.642,13.739 4.041,13.34 4.041,13.223 4.398,12.866 5.922,12.866 6.376,13.32 v1(6.376,14.572) 6.376,15.18 6.744,15.547 6.744,15.918 6.571,16.091 Q1.3 ; v1(11.105,12.713) 11.853,12.713 12.884,13.744 13.583,13.744 14.106,13.222 14.106,13.212 14.547,12.77 14.547,12.135 14.365,11.953 14.365,11.457 14.716,11.105 14.757,11.105 15.408,10.454 15.408,9.264 16.164,8.508 IC1.7
  Bottom Layer w0.254: v1(6.376,14.572) 6.376,14.516 8.179,12.713 v1(11.105,12.713)
NetC11_2: C11.2 IC1.3 Y2.1 | length 4.4
  Top Layer w0.254: IC1.3 20.29,6.485 20.979,6.485 21.026,6.438 21.12,6.438 21.303,6.255 21.534,6.255 21.907,5.882 Y2.1 21.919,5.47 21.919,4.432 22.281,4.07 22.561,4.07 22.734,3.897 C11.2
NetC12_2: C12.2 IC1.4 Y2.2 | length 6.1
  Top Layer w0.254: IC1.4 22.881,7.008 23.692,6.197 24.034,6.197 24.407,5.824 24.407,5.653 24.573,5.819 C12.2
NetC13_2: C13.2 IC1.6 Y1.3 | length 5.7
  Top Layer w0.254: IC1.6 20.29,7.985 21.026,7.985 21.284,8.243 21.284,9.293 21.624,9.633 22.197,9.633 22.882,10.319 22.882,11.138 23.273,11.529 C13.2
NetC14_2: C14.2 IC1.5 Y1.1 | length 7
  Top Layer w0.254: IC1.5 21.305,7.508 21.736,7.939 21.736,8.87 21.982,9.116 23.258,9.116 Y1.1@23.952,8.422 ; Y1.1 25.366,8.006 25.696,8.336 25.696,8.346 25.869,8.519 C14.2@25.879,8.519
NetC21_1: C21.1 Q1.1 R23.2 | length 3.8
  Top Layer w0.254: C21.1 2.576,14.099 R23.2 2.682,15.253 4.199,16.77 Q1.1
NetC21_2: C21.2 D21.2 R24.1 Z1.1 | length 5.7
  Top Layer w0.254: R24.1 0.951,14.026 C21.2 0.952,11.673 1.108,11.517 1.108,9.779 Z1.1@1.235,9.652
P0_D1: H2.19 IC1.62 | length 9.8
  Top Layer w0.254: IC1.62 17.305,3.494 17.305,2.267 17.475,2.097 22.604,2.097 22.697,2.004 23.008,2.004 v1(23.008,1.964)
  Bottom Layer w0.254: v1@22.983,2.029 22.917,1.964 v1(23.008,1.964) 23.323,1.964 23.79,1.497 H2.19
P0_D2: H2.20 IC1.61 | length 11.4
  Top Layer w0.254: IC1.61 16.802,3.497 16.802,2.195 17.306,1.691 21.591,1.691 21.931,1.351 24.211,1.351 v1(24.524,1.664)
  Bottom Layer w0.254: v1(24.524,1.664) 25.084,1.103 H2.20
P0_D3: H2.21 IC1.11 | length 17.4
  Top Layer w0.254: IC1.11 20.29,10.531 21.301,10.531 21.79,11.021 21.954,11.185 22.174,11.405 v1(22.301,11.405)
  Bottom Layer w0.254: v1(22.301,11.405) 22.398,11.405 23.017,12.024 24.001,12.024 26.098,9.927 26.098,1.67 26.105,1.663 26.105,0.923 26.378,0.65 H2.21
PC12: IC1.53 R321.2 | length 9
  Top Layer w0.254: R321.2@6.579,8.34 6.612,8.373 v1(6.612,8.394) ; v1@12.681,4.935 v1(12.686,4.93) 12.756,4.86 12.756,3.543 IC1.53
  Bottom Layer w0.254: v1(6.612,8.394) 6.737,8.394 10.207,4.925 10.703,4.925 10.709,4.93 v1(12.686,4.93)
PD2: IC1.54 R32.2 | length 11.2
  Top Layer w0.254: IC1.54 13.302,3.543 13.302,5.526 v1(13.391,5.615)
  Bottom Layer w0.254: v1(6.612,7.1) 7.386,7.1 10.154,4.332 12.436,4.332 12.437,4.331 12.934,4.331 12.935,4.332 13.069,4.332 13.359,4.622 13.359,5.583 v1(13.391,5.615)
SW_CLK: IC1.49 P1.2 | length 9.9
  Top Layer w0.254: v1(3.058,4.458) 6.373,4.458 v1(6.39,4.475) ; v1@9.895,3.743 9.902,3.736 10.779,3.736 IC1.49
  Bottom Layer w0.254: P1.2 1.916,4.511 v1@2.776,4.511 ; v1@6.406,4.212 6.748,3.87 9.626,3.87 v1(9.697,3.941)
SW_IO: IC1.46 P1.3 | length 8.5
  Top Layer w0.254: v1@2.568,6.381 6.74,6.381 6.86,6.501 8.783,6.501 IC1.46
  Bottom Layer w0.254: P1.3@1.181,4.999 1.416,4.999 2.35,5.933 2.35,6.169 v1@2.574,6.393 ; v1(2.568,6.399) 2.568,6.531 v1@2.579,6.542
VCAP_1: C41.1 IC1.31 R43.1 | length 14.9
  Top Layer w0.254: R43.1 2.705,8.417 C41.1@3.982,8.417 ; C41.1 4.188,8.863 4.661,8.863 6.961,11.163 6.961,11.611 7.305,11.955 7.305,13.869 7.844,14.408 v1(7.844,15.36) ; v1(9.948,14.183) 10.003,14.128 10.365,14.128 10.513,13.979 11.125,13.979 11.256,14.11 11.256,14.973 IC1.31
  Bottom Layer w0.254: v1@7.803,15.451 9.071,14.183 v1(9.948,14.183)
VCAP_2: C41.2 IC1.47 R42.1 | length 9.4
  Top Layer w0.254: R42.1 3.836,7.351 C41.2@3.982,7.497 ; v1(2.945,5.655) 3.012,5.655 3.301,5.944 5.98,5.944 5.987,5.937 7.937,5.937 ; 7.938,5.938 8.76,5.938 IC1.47@8.786,5.963
  Bottom Layer w0.254: v1(2.945,5.655) 3.973,6.683 v1(3.973,7.274)
VCC2: C52.2 C53.2 H1.1 IC1.1 IC1.13 IC1.19 IC1.32 IC1.48 IC1.64 R11.2 R12.2 R21.1 | length 71.2
  Top Layer w0.254: R11.2@3.589,4.971 3.853,5.235 5.186,5.235 5.459,5.508 IC1.48 10.439,5.508 v1(10.455,5.524) ; R21.1 5.503,15.362 5.128,15.737 5.128,16.783 5.513,17.168 v1(7.825,17.168) ; IC1.32 10.779,16.06 v1(11.225,16.506) ; v1(13.809,6.838) 18.379,6.838 v1(18.956,6.261) 18.956,4.78 19.222,4.514 19.273,4.514 ; IC1.19 17.3,14.975 17.3,13.967 17.572,13.694 v1@17.572,13.314 ; v1@17.722,13.164 v1@17.766,13.121 ; v1@17.765,13.188 v1(17.765,13.207) ; v1@17.766,13.188 v1@17.766,13.121 ; v1@17.842,13.044 v1@17.766,13.121 ; IC1.64 18.279,3.879 18.302,3.902 18.661,3.902 18.967,4.208 ; v1(18.898,11.485) 20.244,11.485 IC1.13 20.278,11.52 21.061,11.52 21.284,11.743 21.284,12.143 23.99,14.85 C52.2 ; C53.2 19.902,3.573 19.654,3.821 19.559,3.821 19.172,4.208 18.967,4.208 ; IC1.1 19.908,5.508 19.885,5.485 19.885,5.126 19.273,4.514 ; C52.2@24.572,14.868 26.378,16.675 H1.1 ; 18.967,4.208 19.273,4.514
  Bottom Layer w0.254: v1(7.825,17.168) 8.35,17.168 9.874,15.644 10.982,15.644 11.225,15.887 ; v1(10.455,5.524) 10.576,5.645 12.572,5.645 13.189,6.262 13.535,6.262 13.809,6.536 v1(13.809,6.838) ; v1(11.225,16.506) 11.225,15.887 ; 17.384,11.831 17.384,11.334 17.635,11.083 17.654,11.083 17.735,11.001 18.232,11.001 18.244,11.014 18.335,10.923 ; 17.384,11.831 17.384,11.931 17.635,12.182 17.635,12.657 17.766,12.788 17.766,13.188 v1@17.699,13.121 ; v1@17.693,13.26 17.693,13.188 17.693,12.78 15.929,12.78 15.382,13.327 15.382,13.631 15.031,13.983 14.534,13.983 14.183,13.631 14.183,13.135 14.188,13.129 14.188,12.351 13.959,12.122 13.959,12.03 13.648,11.72 13.111,11.72 12.76,12.071 12.76,12.639 12.518,12.881 12.518,13.975 11.225,15.268 11.225,15.887 ; v1@17.765,13.188 v1(17.765,13.207) ; v1(18.898,11.485) 18.335,10.923 ; v1(18.956,6.261) 18.956,10.302 18.335,10.923
VCC3: C51.2 H1.2 R111.2 R121.2 | length 35.6
  Top Layer w0.254: R111.2@7.306,4.616 9.899,4.616 10.207,4.924 10.923,4.924 11.054,5.056 11.054,5.772 10.337,6.49 10.337,6.97 10.717,7.35 11.723,7.35 11.725,7.352 12.583,7.352 12.595,7.365 13.092,7.365 13.105,7.352 13.475,7.352 13.561,7.438 14.058,7.438 14.246,7.249 17.749,7.249 v1(18.332,7.832) ; v1(22.401,15.264) 23.355,15.264 25.084,16.993 H1.2
  Bottom Layer w0.254: v1(18.332,7.832) 18.327,7.827 18.327,5.582 18.652,5.257 19.846,5.257 19.995,5.406 19.995,13.884 21.375,15.264 v1(22.401,15.264)
pads on no net: H1.15 IC1.2 IC1.22 IC1.26 IC1.27 IC1.29 IC1.40 IC1.50

## Polygon pours and split planes (outlines as drawn)
no net on Bottom Layer "NONET_L02_P000" (solid, pour order 0): 0.254,18.161

## Silkscreen, mask and mechanical layers (free items; w line width, h text height)
Bottom Overlay:
  lines w1: 1.861,16.592 ccw(c1.363,16.545) 1.863,16.545
  text "MCU_M_V2" at 8.24,13.502 h1
Mechanical 1:
  pour cut-out: 5.339,12.008
  lines w0.2: 0,0 0,19 26.876,19 26.876,0 0,0